# EAGLE board FSR_4 (EAGLE 7.2.0)
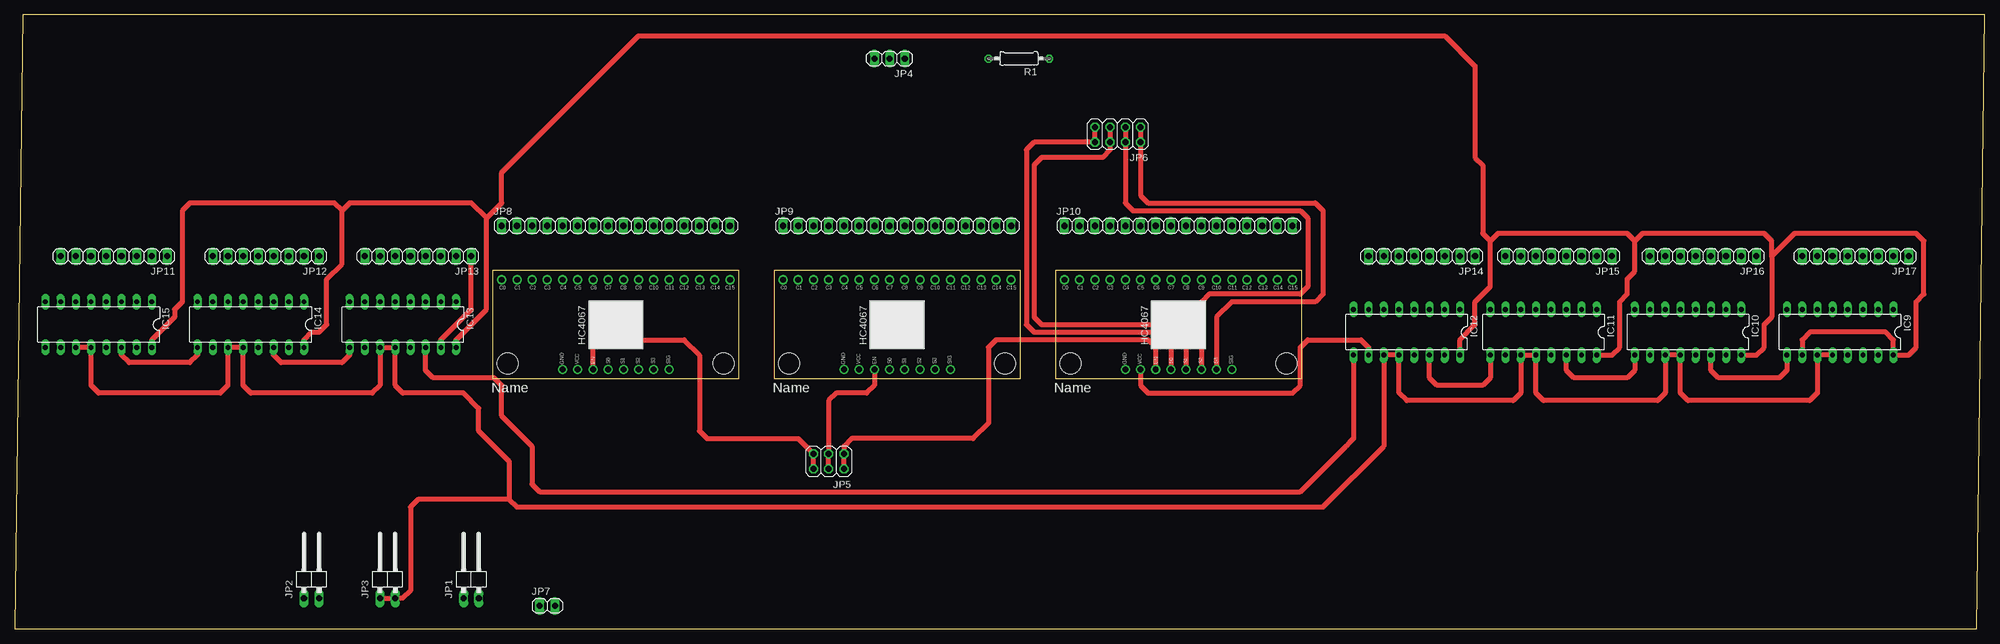
[diagram p0: board, top side]
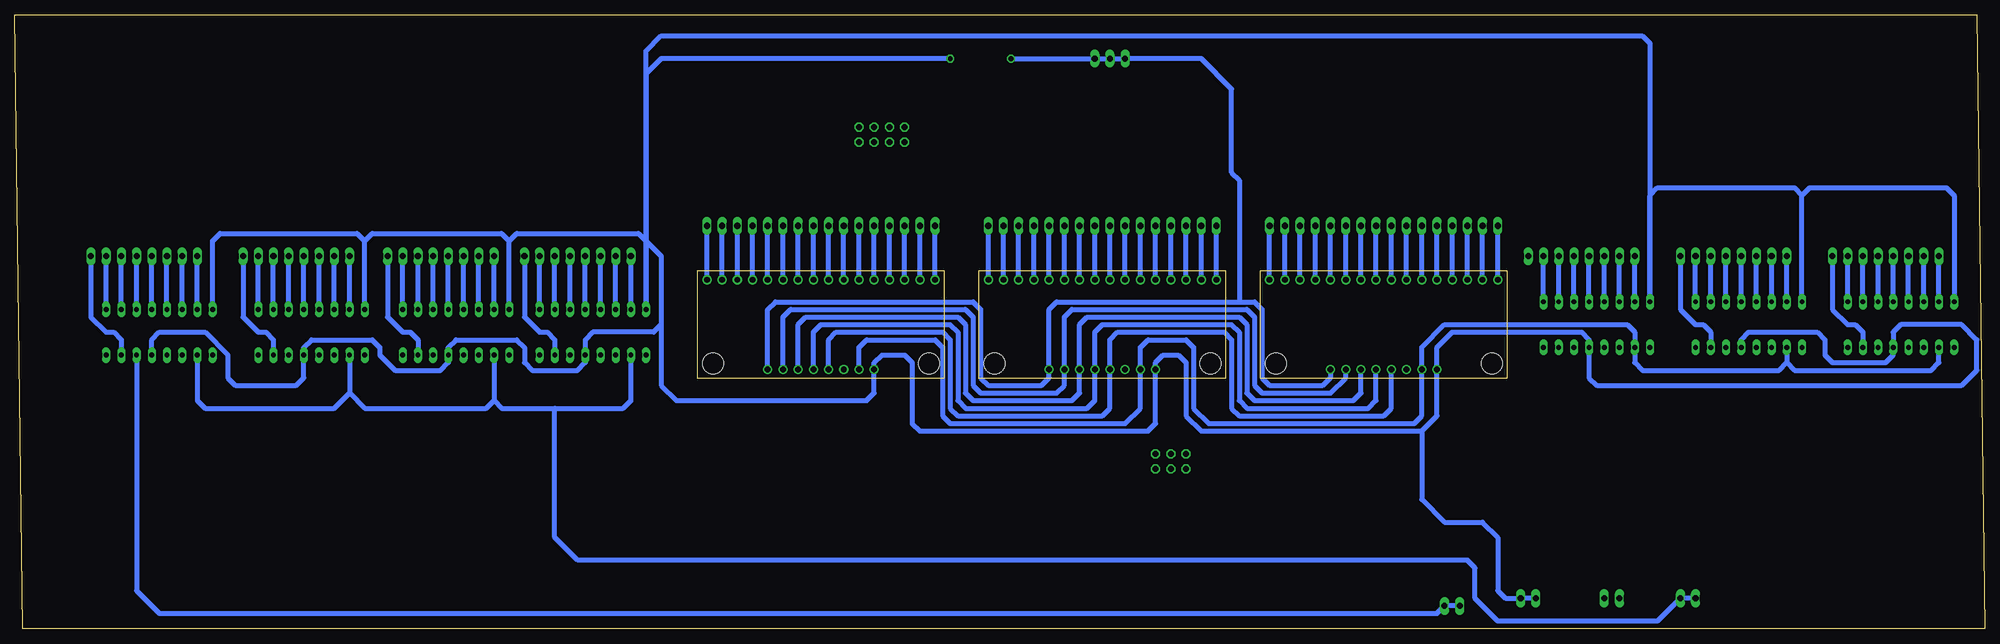
[diagram p1: board, bottom side, seen from below]

Size 328.91 x 102.54 mm. Coordinates in mm from the lower left corner, seen from the top.
Outline: 0,0 327.64,0 328.91,102.54 1.27,102.54 0,0
Copper layers (1*16): Top 0.035mm / dielectric 1.5mm / Bottom 0.035mm
Design rules "default": minimum track width 10mil, minimum drill 24mil, track to track 8mil, track to pad 8mil, pad to pad 8mil, via to via 8mil, smd to smd 8mil, copper to edge 40mil, drill to drill 8mil, minimum pad ring 10mil, minimum via ring 8mil, stop-mask expansion 4mil, vias tented up to drill 0mil, thermal gap 10mil

## Footprints (pad centres in the part's own frame; a part is rotated, then mirrored left to right if it is on the bottom)
DIL16 = drill 0.813 long: 1 -8.89,-3.81; 2 -6.35,-3.81; 3 -3.81,-3.81; 4 -1.27,-3.81; 5 1.27,-3.81; 6 3.81,-3.81; 7 6.35,-3.81; 8 8.89,-3.81; 9 8.89,3.81; 10 6.35,3.81; 11 3.81,3.81; 12 1.27,3.81; 13 -1.27,3.81; 14 -3.81,3.81; 15 -6.35,3.81; 16 -8.89,3.81
1X02/90 = drill 1.016 long: 1 -1.27,-3.81; 2 1.27,-3.81
1X03 = drill 1.016 long: 1 -2.54,0; 2 0,0; 3 2.54,0
2X03 = drill 1.016 octagon: 1 -2.54,-1.27; 2 -2.54,1.27; 3 0,-1.27; 4 0,1.27; 5 2.54,-1.27; 6 2.54,1.27
2X04 = drill 1.016 octagon: 1 -3.81,-1.27; 2 -3.81,1.27; 3 -1.27,-1.27; 4 -1.27,1.27; 5 1.27,-1.27; 6 1.27,1.27; 7 3.81,-1.27; 8 3.81,1.27
1X02 = drill 1.016 long: 1 -1.27,0; 2 1.27,0
1X16 = drill 1.016 long: 1 -19.05,0; 2 -16.51,0; 3 -13.97,0; 4 -11.43,0; 5 -8.89,0; 6 -6.35,0; 7 -3.81,0; 8 -1.27,0; 9 1.27,0; 10 3.81,0; 11 6.35,0; 12 8.89,0; 13 11.43,0; 14 13.97,0; 15 16.51,0; 16 19.05,0
1X08 = drill 1.016 long: 1 -8.89,0; 2 -6.35,0; 3 -3.81,0; 4 -1.27,0; 5 1.27,0; 6 3.81,0; 7 6.35,0; 8 8.89,0
0207/10 = drill 0.813 octagon: 1 -5.08,0; 2 5.08,0
ANALOG_MUX_BREAKOUT_HC4067 = drill 1: C0 19.05,-7.493; C1 16.51,-7.493; C2 13.97,-7.493; C3 11.43,-7.493; C4 8.89,-7.493; C5 6.35,-7.493; C6 3.81,-7.493; C7 1.27,-7.493; C8 -1.27,-7.493; C9 -3.81,-7.493; C10 -6.35,-7.493; C11 -8.89,-7.493; C12 -11.43,-7.493; C13 -13.97,-7.493; C14 -16.51,-7.493; C15 -19.05,-7.493; EN 3.81,7.493; GND 8.89,7.493; S0 1.27,7.493; S1 -1.27,7.493; S2 -3.81,7.493; S3 -6.35,7.493; SIG -8.89,7.493; VCC 6.35,7.493 | hole 3.556: 18.034,6.477; -18.034,6.477

## Placement (x,y rotation side)
IC9  74HC595N  [DIL16]  304.8,49.53 180 top
IC10  74HC595N  [DIL16]  279.4,49.53 180 top
IC11  74HC595N  [DIL16]  255.27,49.53 180 top
IC12  74HC595N  [DIL16]  232.41,49.53 180 top
IC13  74HC595N  [DIL16]  64.77,50.8 180 top
IC14  74HC595N  [DIL16]  39.37,50.8 180 top
IC15  74HC595N  [DIL16]  13.97,50.8 180 top
JP1  [1X02/90]  76.2,8.89 0 top
JP2  [1X02/90]  49.53,8.89 0 top
JP3  [1X02/90]  62.23,8.89 0 top
JP4  [1X03]  146.05,95.25 180 top
JP5  [2X03]  135.89,27.94 180 top
JP6  [2X04]  184.15,82.55 180 top
JP7  [1X02]  88.9,3.81 0 top
JP8  [1X16]  100.33,67.31 0 top
JP9  [1X16]  147.32,67.31 0 top
JP10  [1X16]  194.31,67.31 0 top
JP11  [1X08]  16.51,62.23 180 top
JP12  [1X08]  41.91,62.23 180 top
JP13  [1X08]  67.31,62.23 180 top
JP14  [1X08]  234.95,62.23 180 top
JP15  [1X08]  257.81,62.23 180 top
JP16  [1X08]  281.94,62.23 180 top
JP17  [1X08]  307.34,62.23 180 top
R1  [0207/10]  167.64,95.25 180 top
U$1  HC4067_BREAKOUT_BOARD  [ANALOG_MUX_BREAKOUT_HC4067]  100.33,50.8 180 top
U$2  HC4067_BREAKOUT_BOARD  [ANALOG_MUX_BREAKOUT_HC4067]  147.32,50.8 180 top
U$3  HC4067_BREAKOUT_BOARD  [ANALOG_MUX_BREAKOUT_HC4067]  194.31,50.8 180 top

## Library data of the parts
IC9-IC15 = 74xx-eu
JP1-JP17 = pinhead
R1 = rcl
U$1-U$3 = HC4067_breakout_board

## Nets
GND: IC9.8 IC10.8 IC11.8 IC12.8 IC13.8 IC14.8 IC15.8
N$1: IC9.13 IC10.13 IC11.13 IC12.13 IC13.13 IC14.13 IC15.13 JP1.1 JP1.2 R1.1 U$1.GND U$2.GND U$3.GND
N$3: IC9.11 IC9.12 IC10.11 IC10.12 IC11.11 IC11.12 IC12.11 IC12.12 IC13.11 IC13.12 IC14.11 IC14.12 IC15.11 IC15.12 JP3.1 JP3.2
N$4: JP4.3 R1.2 U$1.SIG U$2.SIG U$3.SIG
N$5: IC9.15 JP17.1
N$6: IC9.14 JP7.1 JP7.2
N$7: IC9.9 IC10.14
N$8: IC10.9 IC11.14
N$9: IC11.9 IC12.14
N$10: IC12.9 IC13.14
N$11: IC13.9 IC14.14
N$12: IC14.9 IC15.14
N$13: JP6.1 JP6.2 U$1.S3 U$2.S3 U$3.S3
N$14: JP6.3 JP6.4 U$1.S2 U$2.S2 U$3.S2
N$15: JP6.5 JP6.6 U$1.S1 U$2.S1 U$3.S1
N$16: JP6.7 JP6.8 U$1.S0 U$2.S0 U$3.S0
N$17: JP5.1 JP5.2 U$3.EN
N$18: JP5.3 JP5.4 U$2.EN
N$19: JP5.5 JP5.6 U$1.EN
N$20: IC9.1 JP17.2
N$21: IC9.2 JP17.3
N$22: IC9.3 JP17.4
N$23: IC9.4 JP17.5
N$24: IC9.5 JP17.6
N$25: IC9.6 JP17.7
N$26: IC9.7 JP17.8
N$27: IC10.15 JP16.1
N$28: IC10.1 JP16.2
N$29: IC10.2 JP16.3
N$30: IC10.3 JP16.4
N$31: IC10.4 JP16.5
N$32: IC10.5 JP16.6
N$33: IC10.6 JP16.7
N$34: IC10.7 JP16.8
N$35: IC11.15 JP15.1
N$36: IC11.1 JP15.2
N$37: IC11.2 JP15.3
N$38: IC11.3 JP15.4
N$39: IC11.4 JP15.5
N$40: IC11.5 JP15.6
N$41: IC11.6 JP15.7
N$42: IC11.7 JP15.8
N$43: IC12.15 JP14.1
N$44: IC12.1 JP14.2
N$45: IC12.2 JP14.3
N$46: IC12.3 JP14.4
N$47: IC12.4 JP14.5
N$48: IC12.5 JP14.6
N$49: IC12.6 JP14.7
N$50: IC12.7 JP14.8
N$51: IC13.15 JP13.1
N$52: IC13.1 JP13.2
N$53: IC13.2 JP13.3
N$54: IC13.3 JP13.4
N$55: IC13.4 JP13.5
N$56: JP10.6 U$3.C5
N$57: IC13.5 JP13.6
N$58: IC13.6 JP13.7
N$59: IC13.7 JP13.8
N$60: IC14.15 JP12.1
N$61: IC14.1 JP12.2
N$62: IC14.2 JP12.3
N$63: IC14.3 JP12.4
N$64: IC14.4 JP12.5
N$65: IC14.5 JP12.6
N$66: IC14.6 JP12.7
N$67: IC14.7 JP12.8
N$68: IC15.15 JP11.1
N$69: IC15.1 JP11.2
N$70: IC15.2 JP11.3
N$71: IC15.3 JP11.4
N$72: IC15.4 JP11.5
N$73: IC15.5 JP11.6
N$74: IC15.6 JP11.7
N$75: IC15.7 JP11.8
N$76: JP8.1 U$1.C0
N$77: JP8.2 U$1.C1
N$78: JP8.3 U$1.C2
N$79: JP8.4 U$1.C3
N$80: JP8.5 U$1.C4
N$81: JP8.6 U$1.C5
N$82: JP8.7 U$1.C6
N$83: JP8.8 U$1.C7
N$84: JP8.9 U$1.C8
N$85: JP8.10 U$1.C9
N$86: JP8.11 U$1.C10
N$87: JP8.12 U$1.C11
N$88: JP8.13 U$1.C12
N$89: JP8.14 U$1.C13
N$90: JP8.15 U$1.C14
N$91: JP8.16 U$1.C15
N$92: JP9.1 U$2.C0
N$93: JP9.2 U$2.C1
N$94: JP9.3 U$2.C2
N$95: JP9.4 U$2.C3
N$96: JP9.5 U$2.C4
N$97: JP9.6 U$2.C5
N$98: JP9.7 U$2.C6
N$99: JP9.8 U$2.C7
N$100: JP9.9 U$2.C8
N$101: JP9.10 U$2.C9
N$102: JP9.11 U$2.C10
N$103: JP9.12 U$2.C11
N$104: JP9.13 U$2.C12
N$105: JP9.14 U$2.C13
N$106: JP9.15 U$2.C14
N$107: JP9.16 U$2.C15
N$108: JP10.1 U$3.C0
N$109: JP10.2 U$3.C1
N$110: JP10.3 U$3.C2
N$112: JP10.4 U$3.C3
N$113: JP10.5 U$3.C4
N$114: JP10.7 U$3.C6
N$115: JP10.8 U$3.C7
N$117: JP10.9 U$3.C8
N$118: JP10.10 U$3.C9
N$119: JP10.11 U$3.C10
N$120: JP10.12 U$3.C11
N$121: JP10.13 U$3.C12
N$122: JP10.14 U$3.C13
N$123: JP10.15 U$3.C14
N$124: JP10.16 U$3.C15
VCC: IC9.10 IC9.16 IC10.10 IC10.16 IC11.10 IC11.16 IC12.10 IC12.16 IC13.10 IC13.16 IC14.10 IC14.16 IC15.10 IC15.16 JP2.1 JP2.2 U$1.VCC U$2.VCC U$3.VCC

## Tracks (layer width: path | path; a pad name or v marks a point on that pad's centre or on a via)
GND
  Bottom 0.813: IC9.8 295.91,64.77 294.64,66.04 271.78,66.04 270.51,64.77 | IC10.8 270.51,64.77 | 270.51,64.77 269.24,66.04 247.65,66.04 246.38,64.77 | IC11.8 246.38,64.77 | 246.38,64.77 245.11,66.04 224.79,66.04 223.52,64.77 IC12.8 223.52,96.52 220.98,99.06 57.15,99.06 55.88,97.79 IC13.8 55.88,72.39 54.61,73.66 31.75,73.66 30.48,72.39 | IC14.8 30.48,72.39 | 30.48,72.39 29.21,73.66 6.35,73.66 5.08,72.39 IC15.8
N$1
  Bottom 0.813: IC9.13 306.07,48.26 304.8,49.53 297.18,49.53 293.37,45.72 293.37,41.91 292.1,40.64 281.94,40.64 280.67,41.91 IC10.13 280.67,46.99 279.4,48.26 269.24,48.26 267.97,46.99 267.97,45.72 265.43,43.18 257.81,43.18 256.54,44.45 IC11.13 256.54,46.99 255.27,48.26 245.11,48.26 243.84,46.99 243.84,44.45 242.57,43.18 234.95,43.18 233.68,44.45 IC12.13 233.68,48.26 232.41,49.53 222.25,49.53 220.98,50.8 | 93.98,33.02 130.81,33.02 133.35,35.56 133.35,44.45 134.62,45.72 137.16,45.72 138.43,44.45 U$2.GND 138.43,34.29 139.7,33.02 177.8,33.02 179.07,34.29 179.07,44.45 180.34,45.72 184.15,45.72 185.42,44.45 U$3.GND 185.42,39.37 186.69,38.1 218.44,38.1 220.98,40.64 220.98,50.8 | 93.98,33.02 91.44,35.56 U$1.GND 91.44,46.99 88.9,49.53 67.31,49.53 66.04,48.26 IC13.13 66.04,41.91 64.77,40.64 3.81,40.64 1.27,43.18 1.27,48.26 3.81,50.8 13.97,50.8 15.24,49.53 IC15.13 15.24,45.72 16.51,44.45 25.4,44.45 26.67,45.72 26.67,48.26 27.94,49.53 39.37,49.53 40.64,48.26 IC14.13 | 93.98,33.02 93.98,21.59 90.17,17.78 83.82,17.78 81.28,15.24 81.28,6.35 80.01,5.08 JP1.2 JP1.1 | R1.1 220.98,95.25 223.52,92.71 223.52,64.77 220.98,62.23 220.98,50.8
N$3
  Top 0.813: IC9.12 IC9.11 300.99,39.37 299.72,38.1 279.4,38.1 278.13,39.37 IC10.12 IC10.11 275.59,39.37 274.32,38.1 255.27,38.1 254,39.37 IC11.12 IC11.11 251.46,39.37 250.19,38.1 232.41,38.1 231.14,39.37 IC12.12 IC12.11 228.6,30.48 218.44,20.32 83.82,20.32 82.55,21.59 | 82.55,21.59 82.55,27.94 77.47,33.02 77.47,36.83 74.93,39.37 64.77,39.37 63.5,40.64 IC13.12 IC13.11 60.96,40.64 59.69,39.37 39.37,39.37 38.1,40.64 IC14.12 IC14.11 35.56,40.64 34.29,39.37 13.97,39.37 12.7,40.64 IC15.12 IC15.11 | 82.55,21.59 67.31,21.59 66.04,20.32 66.04,6.35 64.77,5.08 JP3.2 JP3.1
N$4
  Bottom 0.813: U$3.SIG 203.2,53.34 201.93,54.61 168.91,54.61 167.64,53.34 167.64,41.91 166.37,40.64 157.48,40.64 156.21,41.91 U$2.SIG 156.21,53.34 154.94,54.61 124.46,54.61 | 124.46,54.61 121.92,54.61 120.65,53.34 120.65,41.91 119.38,40.64 110.49,40.64 109.22,41.91 U$1.SIG | 124.46,54.61 124.46,74.93 125.73,76.2 125.73,90.17 130.81,95.25 JP4.3 R1.2
N$5
  Bottom 0.813: JP17.1 316.23,52.07 313.69,49.53 312.42,49.53 311.15,48.26 IC9.15
N$6
  Bottom 0.813: IC9.14 308.61,6.35 304.8,2.54 91.44,2.54 JP7.2 JP7.1
N$7
  Top 0.813: IC9.9 295.91,43.18 294.64,41.91 284.48,41.91 283.21,43.18 IC10.14
N$8
  Top 0.813: IC10.9 270.51,43.18 269.24,41.91 260.35,41.91 259.08,43.18 IC11.14
N$9
  Top 0.813: IC11.9 246.38,41.91 245.11,40.64 237.49,40.64 236.22,41.91 IC12.14
N$10
  Top 0.813: IC12.9 223.52,31.75 222.88,31.12 222.25,30.48 214.63,22.86 87.63,22.86 86.36,24.13 86.36,30.48 81.28,35.56 81.28,40.64 80.01,41.91 69.85,41.91 68.58,43.18 IC13.14
N$11
  Top 0.813: IC13.9 55.88,45.72 54.61,44.45 44.45,44.45 43.18,45.72 IC14.14
N$12
  Top 0.813: IC14.9 30.48,45.72 29.21,44.45 19.05,44.45 17.78,45.72 IC15.14
N$13
  Top 0.813: JP6.1 JP6.2 187.96,72.39 189.23,71.12 217.17,71.12 218.44,69.85 218.44,55.88 217.17,54.61 203.2,54.61 200.66,52.07 U$3.S3
  Bottom 0.813: U$3.S3 200.66,52.07 199.39,53.34 170.18,53.34 168.91,52.07 168.91,40.64 167.64,39.37 154.94,39.37 153.67,40.64 U$2.S3 153.67,52.07 152.4,53.34 123.19,53.34 121.92,52.07 121.92,40.64 120.65,39.37 109.22,39.37 106.68,41.91 U$1.S3
N$14
  Top 0.813: JP6.3 JP6.4 185.42,71.12 186.69,69.85 214.63,69.85 215.9,68.58 215.9,57.15 214.63,55.88 199.39,55.88 198.12,54.61 U$3.S2
  Bottom 0.813: U$3.S2 198.12,50.8 196.85,52.07 171.45,52.07 170.18,50.8 170.18,39.37 168.91,38.1 152.4,38.1 151.13,39.37 U$2.S2 151.13,50.8 149.86,52.07 124.46,52.07 123.19,50.8 123.19,39.37 121.92,38.1 105.41,38.1 104.14,39.37 U$1.S2
N$15
  Top 0.813: JP6.5 JP6.6 182.88,80.01 181.61,78.74 171.45,78.74 170.18,77.47 170.18,52.07 171.45,50.8 194.31,50.8 195.58,49.53 U$3.S1
  Bottom 0.813: U$3.S1 195.58,49.53 194.31,50.8 172.72,50.8 171.45,49.53 171.45,38.1 170.18,36.83 149.86,36.83 148.59,38.1 U$2.S1 148.59,49.53 147.32,50.8 125.73,50.8 124.46,49.53 124.46,38.1 123.19,36.83 102.87,36.83 101.6,38.1 U$1.S1
N$16
  Top 0.813: JP6.7 JP6.8 170.18,81.28 168.91,80.01 168.91,50.8 170.18,49.53 191.77,49.53 193.04,48.26 U$3.S0
  Bottom 0.813: U$3.S0 193.04,48.26 191.77,49.53 173.99,49.53 172.72,48.26 172.72,36.83 171.45,35.56 147.32,35.56 146.05,36.83 U$2.S0 146.05,48.26 144.78,49.53 127,49.53 125.73,48.26 125.73,36.83 124.46,35.56 100.33,35.56 99.06,36.83 U$1.S0
N$17
  Top 0.813: U$3.EN 190.5,46.99 189.23,48.26 163.83,48.26 162.56,46.99 162.56,34.29 160.02,31.75 139.7,31.75 138.43,30.48 JP5.1 JP5.2
N$18
  Top 0.813: U$2.EN 143.51,40.64 142.24,39.37 137.16,39.37 135.89,38.1 JP5.3 JP5.4
N$19
  Top 0.813: U$1.EN 96.52,46.99 97.79,48.26 111.76,48.26 114.3,45.72 114.3,33.02 115.57,31.75 130.81,31.75 JP5.5 JP5.6
N$20
  Bottom 0.813: IC9.1 JP17.2
N$21
  Bottom 0.813: IC9.2 JP17.3
N$22
  Bottom 0.813: IC9.3 JP17.4
N$23
  Bottom 0.813: IC9.4 JP17.5
N$24
  Bottom 0.813: IC9.5 JP17.6
N$25
  Bottom 0.813: IC9.6 JP17.7
N$26
  Bottom 0.813: IC9.7 JP17.8
N$27
  Bottom 0.813: JP16.1 290.83,52.07 288.29,49.53 287.02,49.53 285.75,48.26 IC10.15
N$28
  Bottom 0.813: IC10.1 JP16.2
N$29
  Bottom 0.813: IC10.2 JP16.3
N$30
  Bottom 0.813: IC10.3 JP16.4
N$31
  Bottom 0.813: IC10.4 JP16.5
N$32
  Bottom 0.813: IC10.5 JP16.6
N$33
  Bottom 0.813: IC10.6 JP16.7
N$34
  Bottom 0.813: IC10.7 JP16.8
N$35
  Bottom 0.813: JP15.1 266.7,52.07 264.16,49.53 262.89,49.53 261.62,48.26 IC11.15
N$36
  Bottom 0.813: IC11.1 JP15.2
N$37
  Bottom 0.813: IC11.2 JP15.3
N$38
  Bottom 0.813: IC11.3 JP15.4
N$39
  Bottom 0.813: IC11.4 JP15.5
N$40
  Bottom 0.813: IC11.5 JP15.6
N$41
  Bottom 0.813: IC11.6 JP15.7
N$42
  Bottom 0.813: IC11.7 JP15.8
N$43
  Bottom 0.813: JP14.1 243.84,52.07 241.3,49.53 240.03,49.53 238.76,48.26 IC12.15
N$44
  Bottom 0.813: IC12.1 JP14.2
N$45
  Bottom 0.813: IC12.2 JP14.3
N$46
  Bottom 0.813: IC12.3 JP14.4
N$47
  Bottom 0.813: IC12.4 JP14.5
N$48
  Bottom 0.813: IC12.5 JP14.6
N$49
  Bottom 0.813: IC12.6 JP14.7
N$50
  Bottom 0.813: IC12.7 JP14.8
N$51
  Top 0.813: IC13.15 71.12,48.26 76.2,53.34 JP13.1
N$52
  Bottom 0.813: IC13.1 JP13.2
N$53
  Bottom 0.813: IC13.2 JP13.3
N$54
  Bottom 0.813: IC13.3 JP13.4
N$55
  Bottom 0.813: IC13.4 JP13.5
N$56
  Bottom 0.813: U$3.C5 JP10.6
N$57
  Bottom 0.813: IC13.5 JP13.6
N$58
  Bottom 0.813: IC13.6 JP13.7
N$59
  Bottom 0.813: IC13.7 JP13.8
N$60
  Bottom 0.813: JP12.1 50.8,53.34 48.26,50.8 46.99,50.8 45.72,49.53 IC14.15
N$61
  Bottom 0.813: IC14.1 JP12.2
N$62
  Bottom 0.813: IC14.2 JP12.3
N$63
  Bottom 0.813: IC14.3 JP12.4
N$64
  Bottom 0.813: IC14.4 JP12.5
N$65
  Bottom 0.813: IC14.5 JP12.6
N$66
  Bottom 0.813: IC14.6 JP12.7
N$67
  Bottom 0.813: IC14.7 JP12.8
N$68
  Bottom 0.813: JP11.1 25.4,53.34 22.86,50.8 21.59,50.8 20.32,49.53 IC15.15
N$69
  Bottom 0.813: IC15.1 JP11.2
N$70
  Bottom 0.813: IC15.2 JP11.3
N$71
  Bottom 0.813: IC15.3 JP11.4
N$72
  Bottom 0.813: IC15.4 JP11.5
N$73
  Bottom 0.813: IC15.5 JP11.6
N$74
  Bottom 0.813: IC15.6 JP11.7
N$75
  Bottom 0.813: IC15.7 JP11.8
N$76
  Bottom 0.813: U$1.C0 JP8.1
N$77
  Bottom 0.813: U$1.C1 JP8.2
N$78
  Bottom 0.813: U$1.C2 JP8.3
N$79
  Bottom 0.813: U$1.C3 JP8.4
N$80
  Bottom 0.813: U$1.C4 JP8.5
N$81
  Bottom 0.813: U$1.C5 JP8.6
N$82
  Bottom 0.813: U$1.C6 JP8.7
N$83
  Bottom 0.813: U$1.C7 JP8.8
N$84
  Bottom 0.813: U$1.C8 JP8.9
N$85
  Bottom 0.813: U$1.C9 JP8.10
N$86
  Bottom 0.813: U$1.C10 JP8.11
N$87
  Bottom 0.813: U$1.C11 JP8.12
N$88
  Bottom 0.813: U$1.C12 JP8.13
N$89
  Bottom 0.813: U$1.C13 JP8.14
N$90
  Bottom 0.813: U$1.C14 JP8.15
N$91
  Bottom 0.813: U$1.C15 JP8.16
N$92
  Bottom 0.813: U$2.C0 JP9.1
N$93
  Bottom 0.813: U$2.C1 JP9.2
N$94
  Bottom 0.813: U$2.C2 JP9.3
N$95
  Bottom 0.813: U$2.C3 JP9.4
N$96
  Bottom 0.813: U$2.C4 JP9.5
N$97
  Bottom 0.813: U$2.C5 JP9.6
N$98
  Bottom 0.813: U$2.C6 JP9.7
N$99
  Bottom 0.813: U$2.C7 JP9.8
N$100
  Bottom 0.813: U$2.C8 JP9.9
N$101
  Bottom 0.813: U$2.C9 JP9.10
N$102
  Bottom 0.813: U$2.C10 JP9.11
N$103
  Bottom 0.813: U$2.C11 JP9.12
N$104
  Bottom 0.813: U$2.C12 JP9.13
N$105
  Bottom 0.813: U$2.C13 JP9.14
N$106
  Bottom 0.813: U$2.C14 JP9.15
N$107
  Bottom 0.813: U$2.C15 JP9.16
N$108
  Bottom 0.813: U$3.C0 JP10.1
N$109
  Bottom 0.813: U$3.C1 JP10.2
N$110
  Bottom 0.813: U$3.C2 JP10.3
N$112
  Bottom 0.813: U$3.C3 JP10.4
N$113
  Bottom 0.813: U$3.C4 JP10.5
N$114
  Bottom 0.813: U$3.C6 JP10.7
N$115
  Bottom 0.813: U$3.C7 JP10.8
N$117
  Bottom 0.813: U$3.C8 JP10.9
N$118
  Bottom 0.813: U$3.C9 JP10.10
N$119
  Bottom 0.813: U$3.C10 JP10.11
N$120
  Bottom 0.813: U$3.C11 JP10.12
N$121
  Bottom 0.813: U$3.C12 JP10.13
N$122
  Bottom 0.813: U$3.C13 JP10.14
N$123
  Bottom 0.813: U$3.C14 JP10.15
N$124
  Bottom 0.813: U$3.C15 JP10.16
VCC
  Top 0.813: 293.37,62.23 297.18,66.04 317.5,66.04 318.77,64.77 318.77,55.88 317.5,54.61 317.5,46.99 316.23,45.72 IC9.16 313.69,48.26 312.42,49.53 299.72,49.53 298.45,48.26 IC9.10 | 293.37,62.23 293.37,52.07 292.1,50.8 292.1,46.99 290.83,45.72 IC10.16 | 293.37,62.23 293.37,64.77 292.1,66.04 271.78,66.04 270.51,64.77 | IC11.16 266.7,45.72 267.97,46.99 267.97,54.61 269.24,55.88 269.24,58.42 270.51,59.69 270.51,64.77 | 270.51,64.77 269.24,66.04 247.65,66.04 246.38,64.77 | IC12.16 241.3,48.26 243.84,50.8 243.84,54.61 246.38,57.15 246.38,64.77 | 246.38,64.77 245.11,66.04 245.11,77.47 243.84,78.74 243.84,93.98 238.76,99.06 104.14,99.06 81.28,76.2 81.28,71.12 78.74,68.58 | IC13.16 73.66,48.26 78.74,53.34 78.74,68.58 | 78.74,68.58 76.2,71.12 55.88,71.12 54.61,69.85 | IC14.16 48.26,48.26 49.53,49.53 50.8,49.53 52.07,50.8 52.07,58.42 54.61,60.96 54.61,69.85 | 54.61,69.85 53.34,71.12 29.21,71.12 27.94,69.85 27.94,54.61 26.67,53.34 26.67,52.07 22.86,48.26 IC15.16 | U$3.VCC 187.96,40.64 189.23,39.37 213.36,39.37 214.63,40.64 214.63,46.99 215.9,48.26 224.79,48.26 226.06,46.99 IC12.10
  Bottom 0.813: IC9.10 298.45,38.1 297.18,36.83 275.59,36.83 273.05,39.37 | IC10.10 273.05,39.37 | 273.05,39.37 270.51,36.83 250.19,36.83 248.92,38.1 | IC11.10 248.92,38.1 | 248.92,38.1 247.65,36.83 238.76,36.83 | 238.76,36.83 227.33,36.83 226.06,38.1 IC12.10 | U$3.VCC 187.96,46.99 186.69,48.26 175.26,48.26 173.99,46.99 173.99,35.56 172.72,34.29 143.51,34.29 140.97,36.83 U$2.VCC 140.97,46.99 139.7,48.26 133.35,48.26 132.08,46.99 132.08,36.83 129.54,34.29 95.25,34.29 93.98,35.56 U$1.VCC 93.98,46.99 90.17,50.8 59.69,50.8 58.42,49.53 IC13.10 58.42,44.45 57.15,43.18 34.29,43.18 33.02,44.45 | IC14.10 33.02,44.45 | 33.02,44.45 31.75,43.18 8.89,43.18 7.62,44.45 IC15.10 | JP2.1 JP2.2 54.61,1.27 81.28,1.27 85.09,5.08 85.09,10.16 86.36,11.43 234.95,11.43 238.76,15.24 238.76,36.83